# EAGLE board Charging Dock 1.4 (EAGLE 7.3.0)
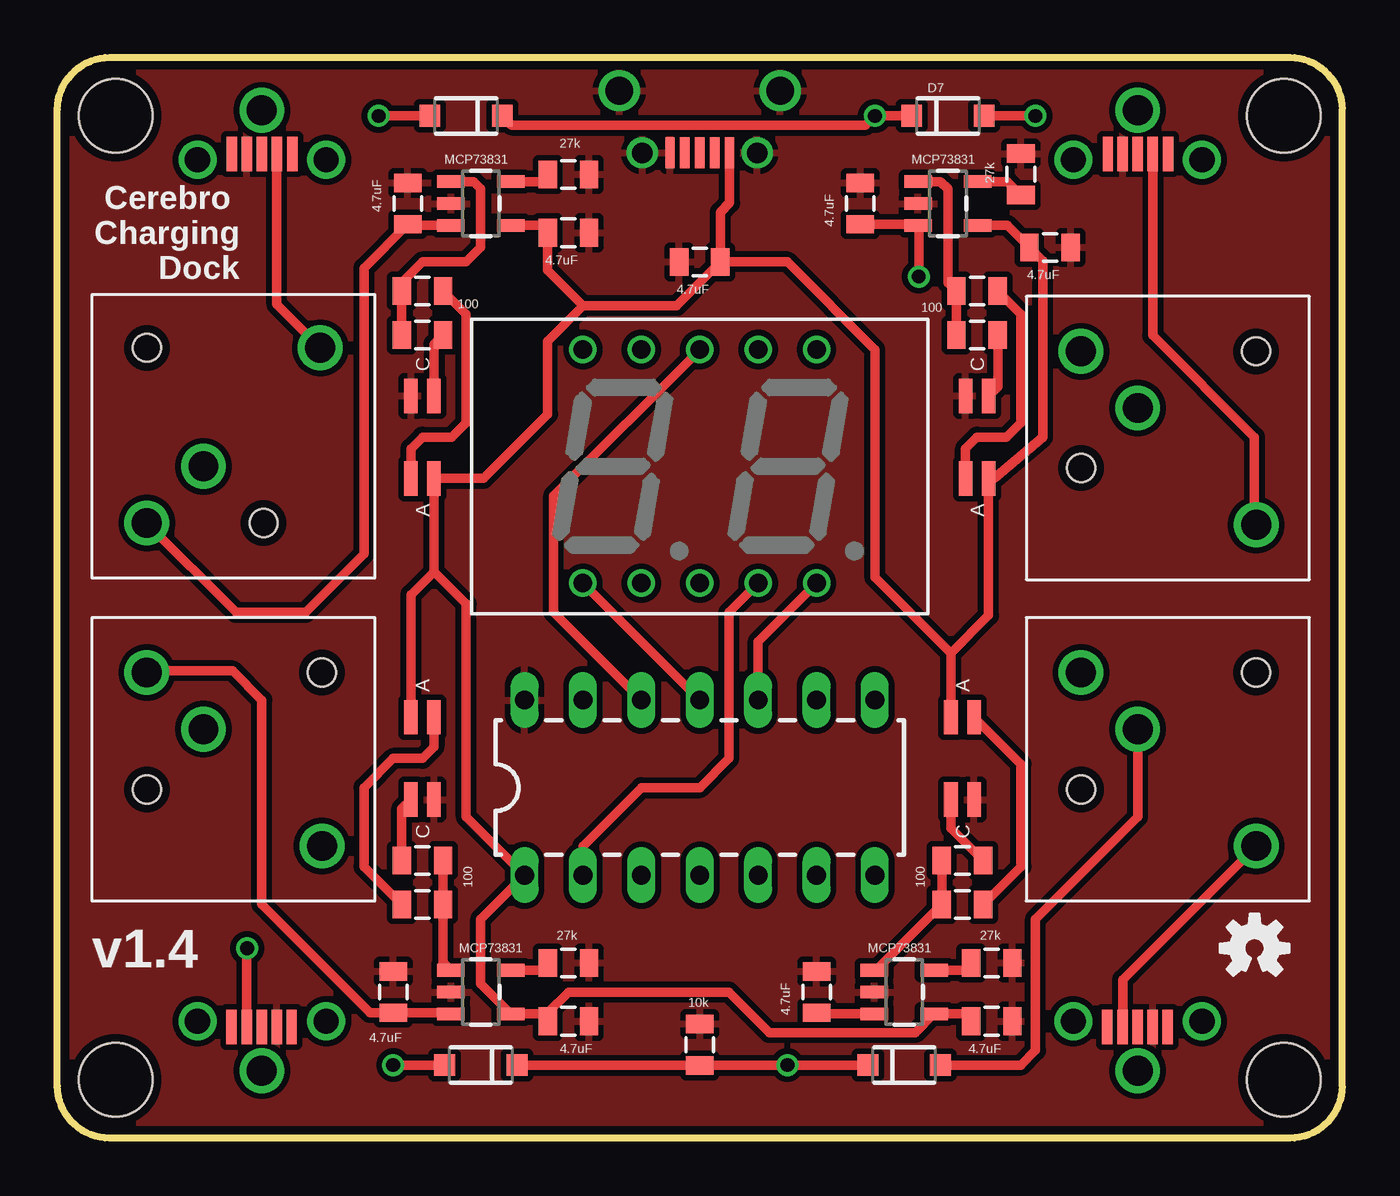
[diagram p0: board, top side]
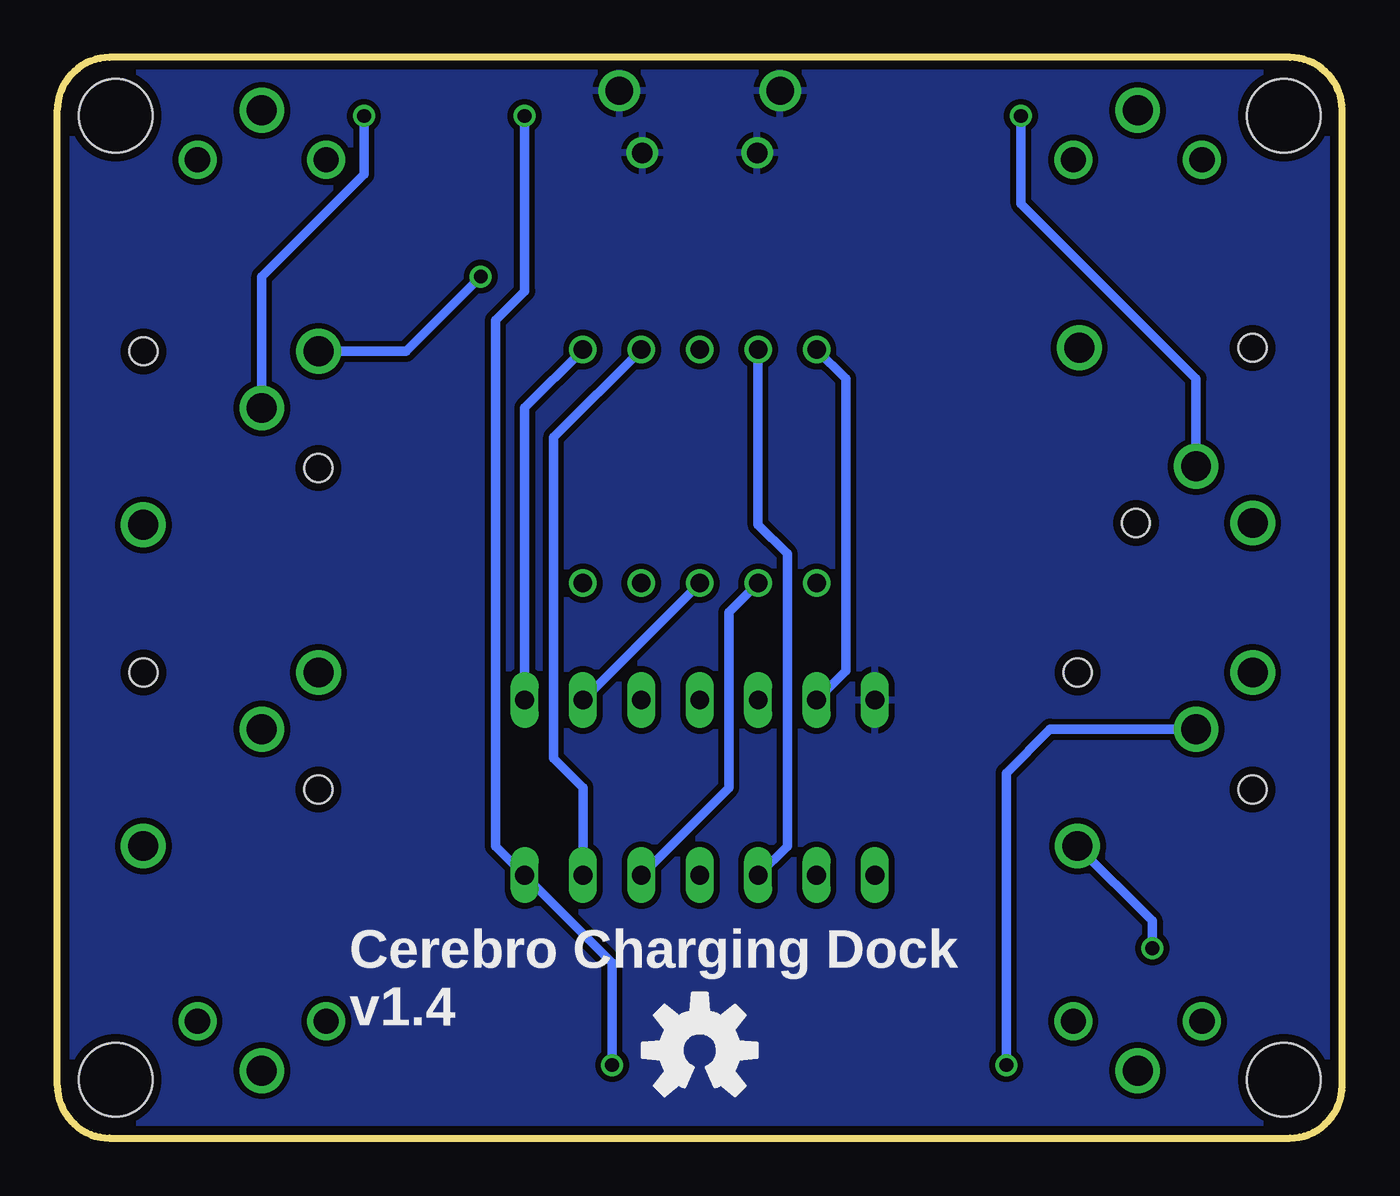
[diagram p1: board, bottom side, seen from below]

Size 55.88 x 46.99 mm. Coordinates in mm from the lower left corner, seen from the top.
Outline: 53.61,0 2.27,0 arc-90 0,2.27 0,44.72 arc-90 2.27,46.99 53.61,46.99 arc-90 55.88,44.72 55.88,2.27 arc-90 53.61,0
Copper layers (1*16): Top 0.0356mm / dielectric 1.5011mm / Bottom 0.0356mm
Design rules "LaenPCBOrder": minimum track width 6mil, minimum drill 13mil, track to track 6mil, track to pad 6mil, pad to pad 6mil, via to via 6mil, smd to smd 6mil, copper to edge 15mil, drill to drill 6mil, minimum pad ring 7mil, minimum via ring 7mil, stop-mask expansion 3mil, vias tented up to drill 0mil, thermal gap 10mil
Net classes: 0 default: width 0.254 mm, clearance 0.254 mm; 1 power: width 0.61 mm, drill 0.61 mm, clearance 0.254 mm; 2 gnd: width 0.305 mm, drill 0.559 mm, clearance 0.254 mm; 3 usbvcc: width 0.508 mm, drill 0.61 mm, clearance 0.254 mm; 4 aref: width 0.406 mm, drill 0.61 mm, clearance 0.254 mm
Holes 3.2 mm at 2.54,2.54 53.34,2.54 2.54,44.45 53.34,44.45

## Footprints (pad centres in the part's own frame; a part is rotated, then mirrored left to right if it is on the bottom)
0805 = smd 0.8 x 1.2: 1 -0.9,0; 2 0.9,0
SOD-123 = smd 0.9 x 0.95: A 1.575,0; C -1.575,0
HDSP-A = drill 0.8: 1 -5.08,-5.08; 2 -2.54,-5.08; 3 0,-5.08; 4 2.54,-5.08; 5 5.08,-5.08; 6 5.08,5.08; 7 2.54,5.08; 8 0,5.08; 9 -2.54,5.08; 10 -5.08,5.08
SOT23-5 = smd 0.55 x 1.2: 1 -0.95,-1.3; 2 0,-1.3; 3 0.95,-1.3; 4 0.95,1.3; 5 -0.95,1.3
SPDT_MOMENTRAY = drill 1.3: 1 -2.464,2.464; 2 0,0; COMMON 5.156,-5.08 | hole 1.219: -2.464,-2.616; 5.156,2.464
DIL14 = drill 0.813 long: 1 -8.89,-3.81; 2 -6.35,-3.81; 3 -3.81,-3.81; 4 -1.27,-3.81; 5 1.27,-3.81; 6 3.81,-3.81; 7 6.35,-3.81; 8 6.35,3.81; 9 3.81,3.81; 10 1.27,3.81; 11 -1.27,3.81; 12 -3.81,3.81; 13 -6.35,3.81; 14 -8.89,3.81
USB_VERT_MICRO_SMD = smd 0.45 x 1.5: P1 -1.33,-0.25; P2 -0.65,-0.25; P3 0,-0.25; P4 0.65,-0.25; P5 1.3,-0.25 | drill 1.1: P$1 -2.8,0; P$2 2.8,0 | drill 1.3: P$3 0,-2.15
LED_DUAL = smd 1.499 x 0.597: GA 1.791,-0.502; GC -1.791,-0.502; RA 1.791,0.502; RC -1.791,0.502
USB_HORZ_REINFORCED_MICRO = drill 1.2: G1 -3.5,0; G2 3.5,0 | smd 0.4 x 1.35: P1 -1.3,2.7; P2 -0.65,2.7; P3 0,2.7; P4 0.65,2.7; P5 1.3,2.7 | drill 0.9: P$1 -2.5,2.7; P$2 2.5,2.7

## Placement (x,y rotation side)
C2  4.7uF  [0805]  34.92,40.64 90 top
C3  4.7uF  [0805]  43.18,38.73 0 top
C4  4.7uF  [0805]  14.61,6.35 90 top
C5  4.7uF  [0805]  22.23,5.08 0 top
C6  4.7uF  [0805]  33.02,6.35 90 top
C7  4.7uF  [0805]  40.64,5.08 0 top
C8  4.7uF  [0805]  27.94,38.1 0 top
C10  4.7uF  [0805]  15.24,40.64 90 top
C11  4.7uF  [0805]  22.23,39.37 0 top
D5  [SOD-123]  17.78,44.45 180 top
D6  [SOD-123]  36.83,3.18 0 top
D7  [SOD-123]  38.73,44.45 0 top
D8  [SOD-123]  18.41,3.18 180 top
DIS1  HD-A1032DIGIT  [HDSP-A]  27.94,29.21 0 top
R1  100  [0805]  40.01,36.83 180 top
R2  100  [0805]  40.01,34.92 180 top
R3  27k  [0805]  41.91,41.91 90 top
R4  100  [0805]  15.88,10.16 0 top
R5  100  [0805]  15.88,12.06 0 top
R6  27k  [0805]  22.23,7.62 0 top
R7  100  [0805]  39.37,10.16 180 top
R8  100  [0805]  39.37,12.06 180 top
R9  27k  [0805]  40.64,7.62 0 top
R10  10k  [0805]  27.94,4.06 90 top
R14  100  [0805]  15.88,36.83 180 top
R15  100  [0805]  15.88,34.92 180 top
R16  27k  [0805]  22.23,41.91 0 top
U1  MCP73831  [SOT23-5]  38.73,40.64 270 top
U2  MCP73831  [SOT23-5]  18.41,6.35 270 top
U3  MCP73831  [SOT23-5]  36.83,6.35 270 top
U5  MCP73831  [SOT23-5]  18.41,40.64 270 top
U$1  SPDT_MOMENTARY  [SPDT_MOMENTRAY]  6.35,29.21 90 top
U$2  ATTINY84ATTINY84-20PU  [DIL14]  29.21,15.24 0 top
U$3  SPDT_MOMENTARY  [SPDT_MOMENTRAY]  46.99,17.78 0 top
U$4  SPDT_MOMENTARY  [SPDT_MOMENTRAY]  6.35,17.78 0 top
U$5  SPDT_MOMENTARY  [SPDT_MOMENTRAY]  46.99,31.75 0 top
U$6  USB_SOCKET_MICRO_VERT  [USB_VERT_MICRO_SMD]  46.99,42.55 180 top
U$7  USB_SOCKET_MICRO_VERT  [USB_VERT_MICRO_SMD]  8.89,42.55 180 top
U$8  USB_SOCKET_MICRO_VERT  [USB_VERT_MICRO_SMD]  8.89,5.08 0 top
U$9  USB_SOCKET_MICRO_VERT  [USB_VERT_MICRO_SMD]  46.99,5.08 0 top
U$11  LED_DUAL  [LED_DUAL]  15.88,30.48 270 top
U$12  LED_DUAL  [LED_DUAL]  40.01,30.48 270 top
U$13  LED_DUAL  [LED_DUAL]  15.88,16.51 90 top
U$14  LED_DUAL  [LED_DUAL]  39.37,16.51 90 top
U$15  [OSHW-LOGO-M]  27.94,3.81 0 bottom
U$16  [OSHW-LOGO-S]  52.07,8.26 0 top
U$17  USB_SOCKET_MICRO_VERTREINFORCED  [USB_HORZ_REINFORCED_MICRO]  27.94,45.54 180 top

## Library data of the parts
C2-C8 C10 C11 = SparkFun-Capacitors; PROD_ID: CAP-11625
D5-D8 = SparkFun-DiscreteSemi
DIS1 = Andy-library; OC_FARNELL: unknown; OC_NEWARK: unknown
R1-R10 R14-R16 U$1 U$3-U$9 U$11-U$14 U$17 = Andy-library
U1-U3 U5 = SparkFun-PowerIC; PROD_ID: IC-09995
U$2 = SparkFun-DigitalIC
U$15 U$16 = SparkFun-Aesthetics

## Nets
5VDC: C3.1 C5.1 C7.1 C8.2 C11.1 U1.4 U2.4 U3.4 U5.4 U$2.1 U$11.RA U$12.RA U$13.RA U$14.RA U$17.P1
GND: C2.2 C3.2 C4.2 C5.2 C6.2 C7.2 C8.1 C10.2 C11.2 R3.2 R6.2 R9.2 R10.2 R16.2 U1.2 U2.2 U3.2 U5.2 U$2.14 U$6.P4 U$7.P4 U$8.P4 U$9.P4 U$11.GC U$12.GC U$13.GC U$14.GC U$17.G1 U$17.G2 U$17.P5 U$17.P$1 U$17.P$2
N$1: DIS1.10 U$2.13
N$2: R3.1 U1.5
N$3: C2.1 U1.3 U$5.1
N$4: R1.2 R2.2 U1.1
N$5: R1.1 U$12.GA
N$6: R2.1 U$12.RC
N$7: R6.1 U2.5
N$8: C4.1 U2.3 U$4.1
N$9: R4.2 R5.2 U2.1
N$10: R4.1 U$13.GA
N$11: U$5.COMMON U$6.P2
N$12: R5.1 U$13.RC
N$13: R9.1 U3.5
N$14: C6.1 U3.3
N$15: R7.2 R8.2 U3.1
N$16: R7.1 U$14.GA
N$17: U$3.COMMON U$9.P2
N$18: R8.1 U$14.RC
N$22: DIS1.8 U$2.12
N$23: DIS1.1 U$2.11
N$24: DIS1.5 U$2.10
N$25: DIS1.3 U$2.9
N$26: DIS1.6 U$2.8
N$27: DIS1.7 U$2.6
N$28: DIS1.9 U$2.3
N$29: U$3.1
N$30: DIS1.2 U$2.5
N$31: DIS1.4 U$2.2
N$32: D6.A U$3.2
N$33: U$4.COMMON U$8.P2
N$34: D8.A U$4.2
N$35: U$1.COMMON U$7.P2
N$36: D5.A U$1.2
N$37: D5.C D6.C D7.C D8.C R10.1 U$2.7
N$39: D7.A U$5.2
N$40: R16.1 U5.5
N$41: C10.1 U5.3 U$1.1
N$42: R14.2 R15.2 U5.1
N$43: R14.1 U$11.GA
N$44: R15.1 U$11.RC

## Tracks (layer width: path | path; a pad name or v marks a point on that pad's centre or on a via)
5VDC
  Top 0.406: C7.1 39.42,5.4 U3.4 37.32,4.59 30.97,4.59 29.21,6.35 22.23,6.35 21.32,5.45 C5.1 21,5.4 U2.4 18.41,6.7 18.41,9.53 U$2.1 17.78,13.97 17.78,23.23 16.38,24.63 | U5.4 21,39.69 C11.1 21.32,37.73 22.86,36.2 | U$13.RA 15.37,23.63 16.38,24.63 | 16.38,24.63 U$11.RA 18.53,28.69 21.32,31.48 21.32,34.66 22.86,36.2 | U$14.RA 38.87,21.09 | C8.2 26.93,36.2 22.86,36.2 | 38.87,21.09 35.56,24.4 35.56,34.29 31.75,38.1 C8.2 | 38.87,21.09 40.51,22.73 U$12.RA 40.75,28.69 42.86,30.48 42.86,38.15 C3.1 41.33,39.69 U1.4 | C8.2 28.84,40.27 29.24,40.67 U$17.P1
GND
  pour Bottom: 0,49.53 55.88,49.53 55.88,-1.27 0,-1.27
  pour Top: 0,49.53 55.88,49.53 55.88,-1.27 0,-1.27
N$1
  Bottom 0.406: DIS1.10 21.59,33.02 21.59,20.32 U$2.13
N$2
  Top 0.406: U1.5 41.33,41.59 R3.1
N$3  (via drill 0.6)
  Top 0.406: C2.1 37.38,39.74 U1.3 37.47,39.66 v37.47,37.46
  Bottom 0.406: U$5.1 40.72,34.21 v37.47,37.46
N$4
  Top 0.406: R2.2 R1.2 38.73,37.2 38.73,41.27 38.42,41.59 U1.1
N$5
  Top 0.406: U$12.GA 39.5,29.98 40.01,30.48 41.27,30.48 41.91,31.12 41.91,35.82 R1.1
N$6
  Top 0.406: U$12.RC 40.91,32.67 R2.1
N$7
  Top 0.406: U2.5 21,7.3 R6.1
N$8
  Top 0.406: U2.3 17.07,5.45 C4.1 13.6,5.45 8.89,10.16 8.89,19.05 7.62,20.32 3.96,20.32 U$4.1
N$9
  Top 0.406: R5.2 R4.2 16.77,7.64 U2.1
N$10
  Top 0.406: U$13.GA 16.38,17.01 15.88,16.51 14.61,16.51 13.34,15.24 13.34,11.8 R4.1
N$11
  Top 0.406: U$6.P2 47.64,34.91 52.07,30.48 52.07,26.75 U$5.COMMON
N$12
  Top 0.406: R5.1 14.97,14.32 U$13.RC
N$13
  Top 0.406: U3.5 39.42,7.3 R9.1
N$14
  Top 0.406: U3.3 33.07,5.4 C6.1
N$15
  Top 0.406: U3.1 35.61,7.3 R7.2 R8.2
N$16
  Top 0.406: R7.1 41.91,11.8 41.91,16.26 U$14.GA
N$17
  Top 0.406: U$9.P2 46.34,6.89 U$3.COMMON
N$18
  Top 0.406: R8.1 38.87,13.47 U$14.RC
N$22
  Top 0.406: DIS1.8 21.59,27.94 21.59,22.86 U$2.12
N$23
  Top 0.406: DIS1.1 U$2.11
N$24
  Top 0.406: U$2.10 30.48,21.59 DIS1.5
N$25
  Bottom 0.406: U$2.9 DIS1.3
N$26
  Bottom 0.406: DIS1.6 35.56,31.75 U$2.8
N$27
  Bottom 0.406: U$2.6 33.02,15.24 34.29,16.51 34.29,30.48 DIS1.7
N$28
  Bottom 0.406: DIS1.9 25.4,26.67 24.13,25.4 24.13,12.7 U$2.3
N$30
  Bottom 0.406: U$2.5 26.67,15.24 26.67,22.86 DIS1.2
N$31
  Top 0.406: U$2.2 22.86,12.7 25.4,15.24 27.94,15.24 29.21,16.51 29.21,22.86 DIS1.4
N$32
  Top 0.406: U$3.2 46.99,13.97 42.55,9.53 42.55,3.81 41.91,3.18 D6.A
N$33  (via drill 0.6)
  Top 0.406: v8.26,8.26 8.24,8.24 U$8.P2
  Bottom 0.406: U$4.COMMON 8.26,9.45 v8.26,8.26
N$34  (via drill 0.6)
  Top 0.406: D8.A v14.61,3.18
  Bottom 0.406: v14.61,3.18 14.61,15.88 12.7,17.78 U$4.2
N$35
  Top 0.406: U$1.COMMON 9.54,36.26 U$7.P2
N$36  (via drill 0.6)
  Top 0.406: v13.97,44.45 D5.A
  Bottom 0.406: U$1.2 6.35,33.02 13.97,40.64 v13.97,44.45
N$37  (via drill 0.6)
  Top 0.406: D6.C v31.75,3.18 31.74,3.16 R10.1 27.93,3.18 D8.C | D7.C v35.56,44.45 35.15,44.04 19.76,44.04 D5.C
  Bottom 0.406: v35.56,44.45 35.56,36.83 36.83,35.56 36.83,12.7 U$2.7 31.75,7.62 v31.75,3.18
N$39  (via drill 0.6)
  Top 0.406: v42.55,44.45 D7.A
  Bottom 0.406: U$5.2 46.99,37.46 42.55,41.91 v42.55,44.45
N$40
  Top 0.406: U5.5 21,41.59 R16.1
N$41
  Top 0.406: U5.3 15.29,39.69 C10.1 13.34,37.84 13.34,25.4 10.79,22.86 7.77,22.86 U$1.1
N$42
  Top 0.406: R15.2 R14.2 14.97,37.2 15.88,38.1 17.78,38.1 18.41,38.73 18.41,41.27 18.1,41.59 U5.1
N$43
  Top 0.406: U$11.GA 15.37,29.98 15.88,30.48 17.14,30.48 17.78,31.12 17.78,35.82 R14.1
N$44
  Top 0.406: R15.1 16.38,34.53 U$11.RC

## Text on the board
tPlace: Cerebro / Charging / Dock | v1.4
bPlace: Cerebro Charging Dock / v1.4
214bmp: D:/SmartProjects/Snc/a4_bn_logo2.bmp